# Altium PCB FPv1.3.1.PcbDoc (part 1 of 4)
Units mm, origin at the board's own origin, x right, y up, seen from the top; angles counter-clockwise.
Board outline 81.28 x 53.34 mm, 4 copper layers (Top Layer, GROUND PLANE, POWER PLANE, Bottom Layer); 98 components, 183 nets, 614 pads, 312 vias.
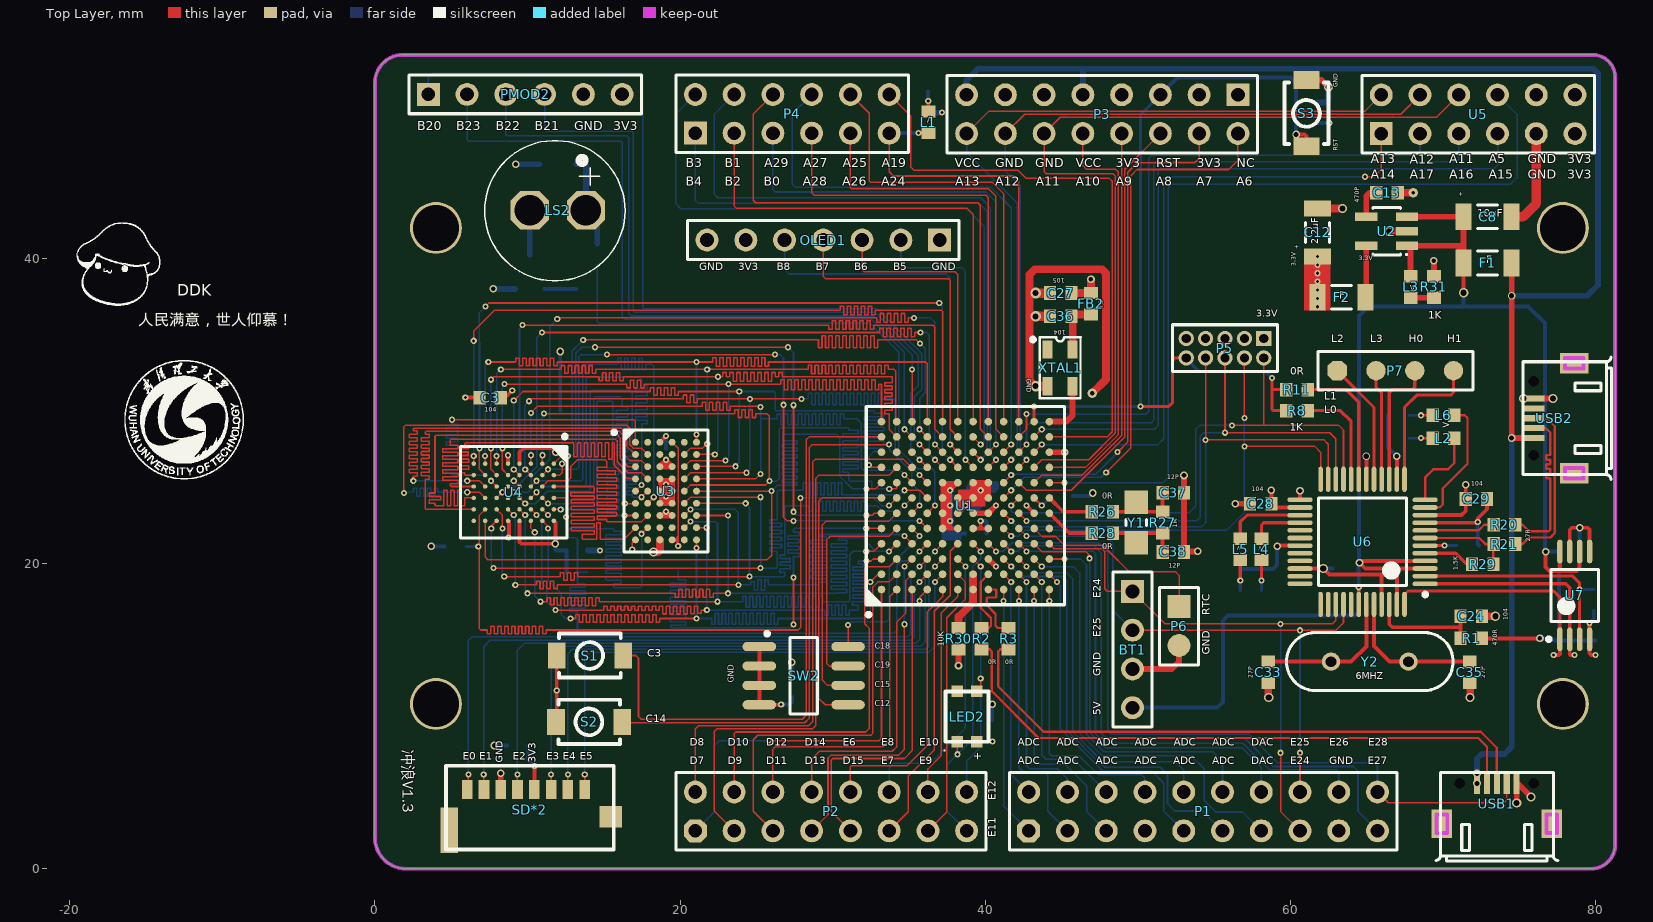
[diagram p0: Top Layer view]
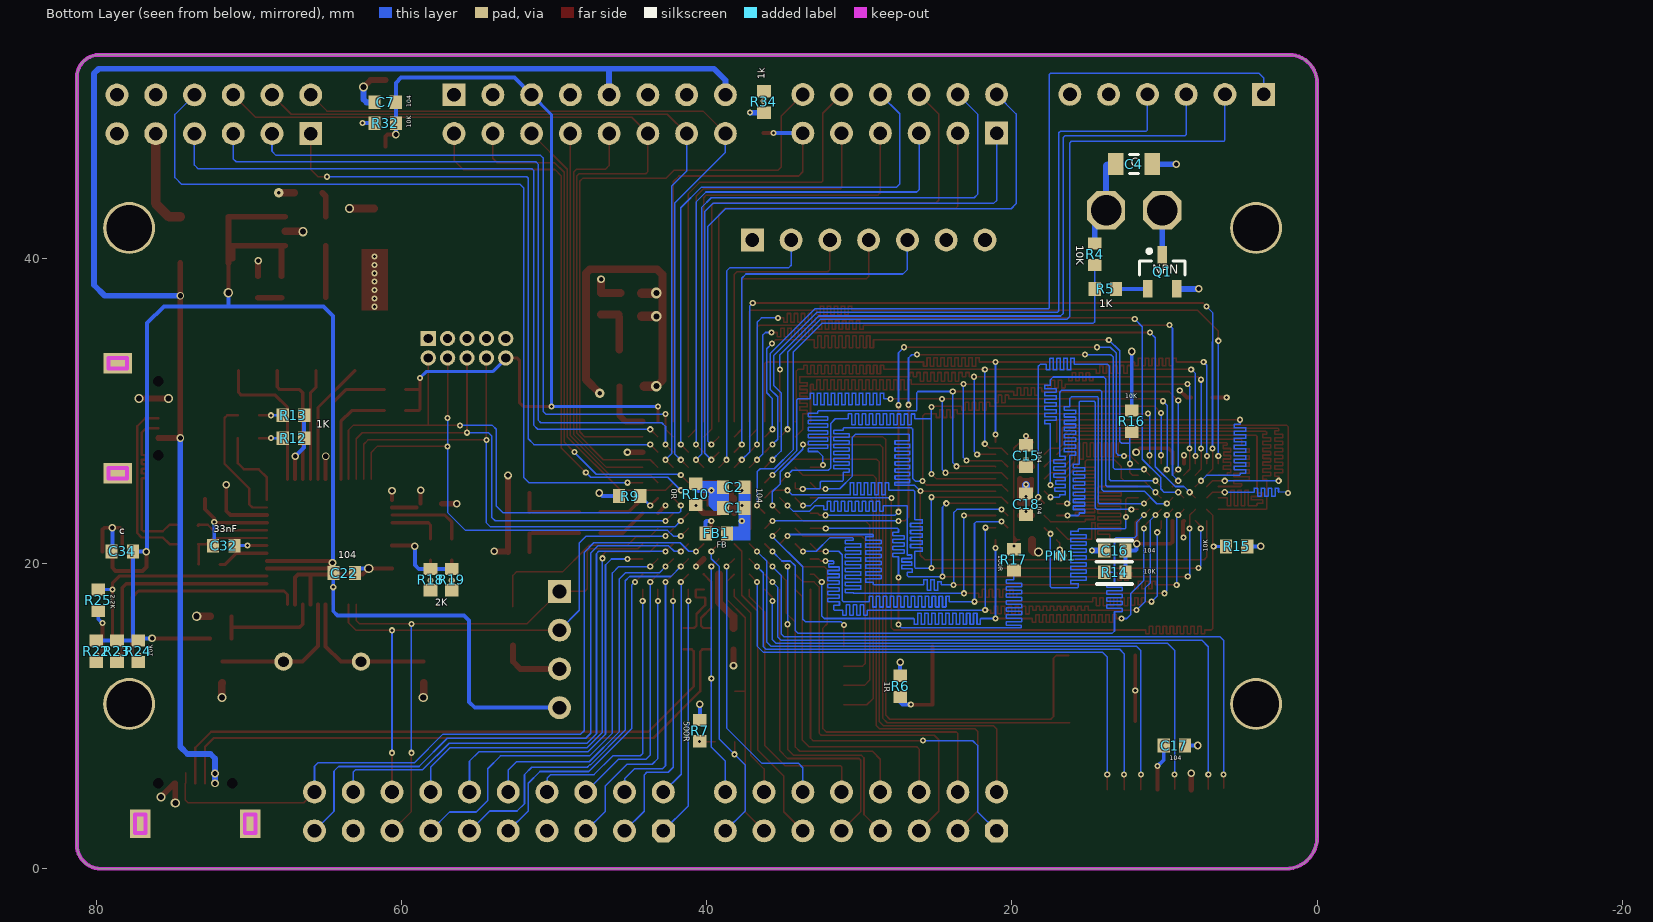
[diagram p1: Bottom Layer view, seen from below]
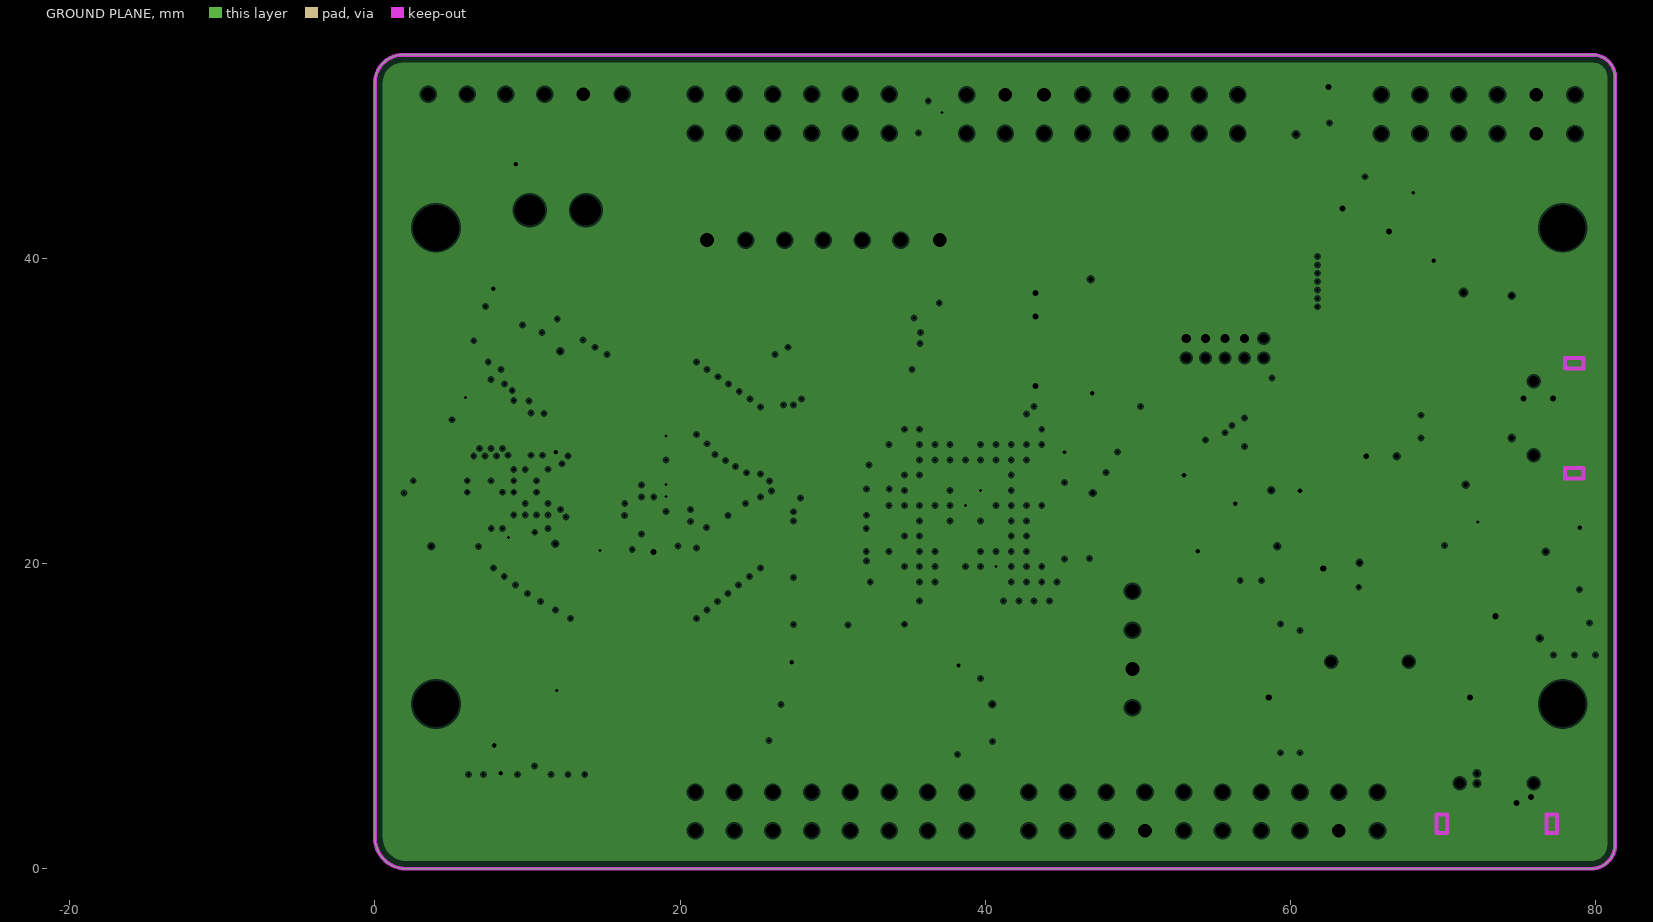
[diagram p2: GROUND PLANE, clearances drawn from the general rule]
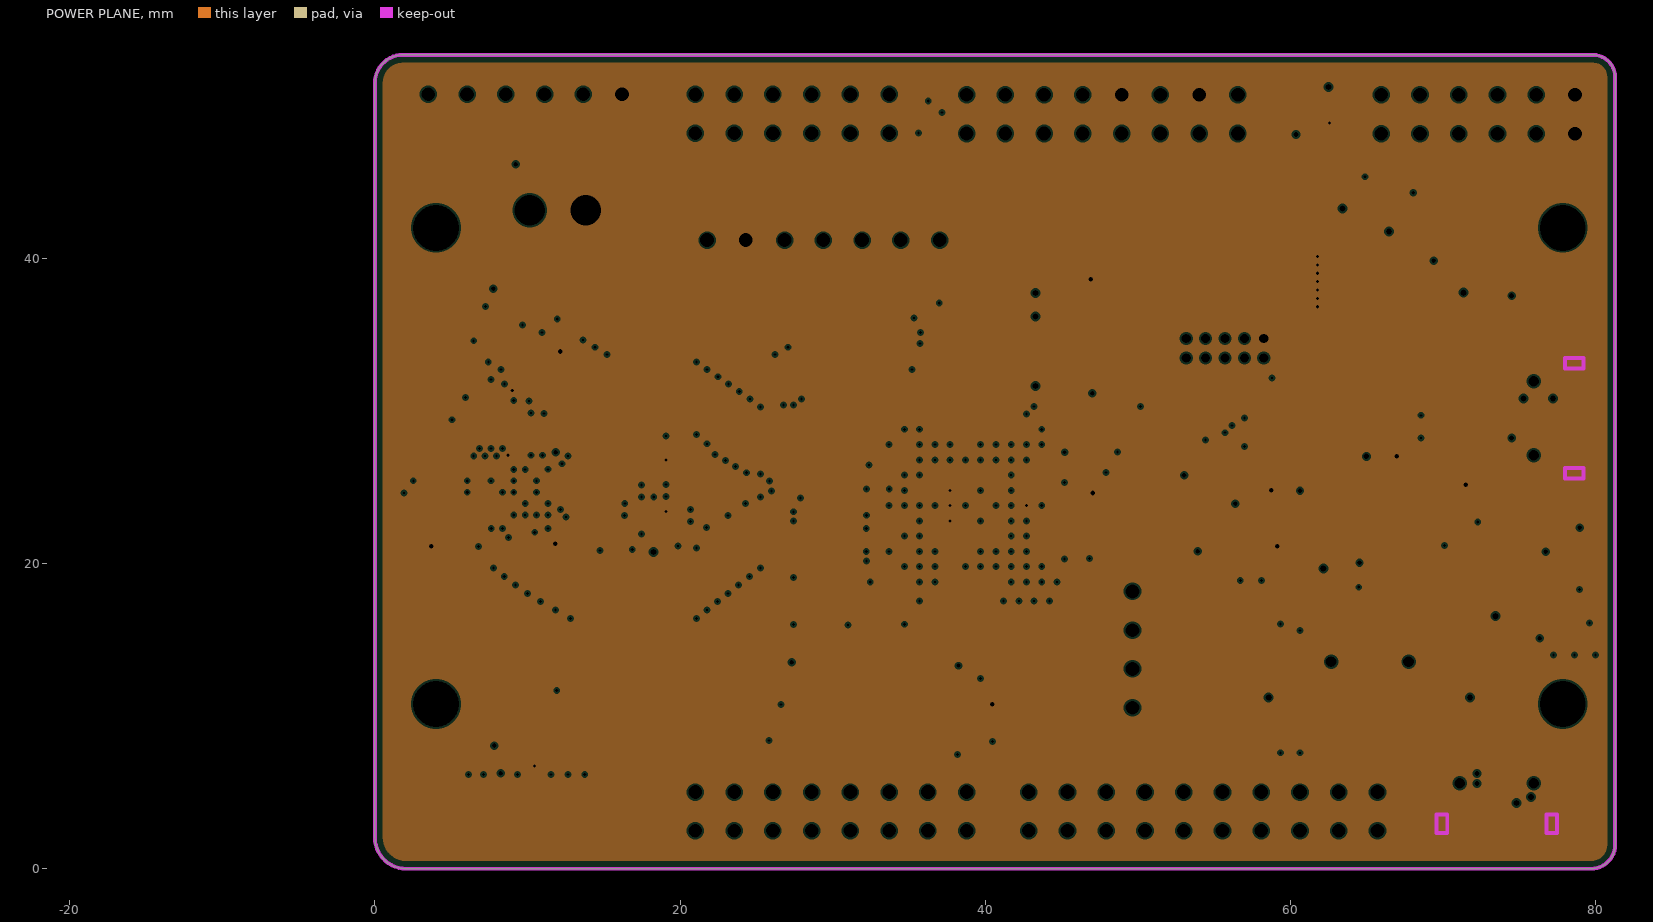
[diagram p3: POWER PLANE, clearances drawn from the general rule]

## Layer stack, top to bottom
Top Layer: signal copper 0.0356
Dielectric: prepreg 0.32, FR-4, Dk 4.8
GROUND PLANE: plane copper 0.0356, net GND
Dielectric: core 0.32, FR-4, Dk 4.8
POWER PLANE: plane copper 0.0356, net 3.3V
Dielectric: prepreg 0.32, FR-4, Dk 4.8
Bottom Layer: signal copper 0.0356

## Board outline
0,2.05 0,51.5 cw(c1.84,51.5) 1.84,53.34 79.81,53.34 cw(c79.81,51.87) 81.28,51.87 81.28,1.58 cw(c79.7,1.58) 79.7,0 2.05,0 cw(c2.05,2.05)

## Design rules (kind name [scope] priority, off if disabled: settings)
Clearance [All] p1: gap=0.102
DiffPairsRouting [All] p1: maxlimit=2.54 minlimit=0.102 mostfreqgap=0.254 bottomlayer_maxgap=1.27 maxuncoupledlength=12.7
HoleSize [All] p1: absolutevalues=TRUE maxlimit=12.7 minlimit=0.2 maxpercent=80.000 minpercent=20.000
PlaneClearance [All] p1: clearance=0.127
PlaneConnect PlaneConnect_1 [All] p1: planeconnectstyle=Direct reliefexpansion=0.102 reliefentries=4 reliefconductorwidth=0.152 reliefairgap=0.254
PolygonConnect [All] p1: connectstyle=Direct reliefconductorwidth=0.254 reliefentries=4 polygonreliefangle="90 Angle" airgapwidth=0.127
RoutingVias [All] p1: holewidth=0.711 width=1.27 viastyle="Through Hole" minholewidth=0.711 minwidth=1.27 maxholewidth=0.711 maxwidth=1.27
SolderMaskExpansion [All] p1: expansion=0.102
Width [All] p1: maxlimit=1.778 minlimit=0.102 preferedwidth=0.254 minimp=50.000000 maximp=50.000000 favimp=50.000000
24 further rules are at their usual default settings.

## Classes and differential pairs
net class PTC[19..12]: PTC3 PTC12 PTC13 PTC14 PTC15 PTC18 PTC19
net class PTD[15..7]: PTD7 PTD8 PTD9 PTD10 PTD11 PTD12 PTD13 PTD14 PTD15
net class PTB[23..0]: PTB0 PTB1 PTB2 PTB3 PTB4 PTB5 PTB6 PTB7 PTB8 PTB20 PTB21 PTB22 PTB23
net class PTA[29..11]: PTA4 PTA5 PTA11 PTA12 PTA13 PTA14 PTA15 PTA16 PTA17 PTA24 PTA25 PTA26 PTA27 PTA28 PTA29
net class FTM3_CH[7..1]: FTM3_CH1 FTM3_CH2 FTM3_CH3 FTM3_CH4 FTM3_CH5 FTM3_CH6 FTM3_CH7
net class ANALOG[13..1]: ANALOG1 ANALOG2 ANALOG3 ANALOG4 ANALOG5 ANALOG6 ANALOG7 ANALOG8 ANALOG9 ANALOG10 ANALOG11 ANALOG12 ANALOG13
from-to class SRAM_DATA: AD0(U1-B2:U4-B6) AD1(U1-A2:U4-C5) AD2(U1-A3:U4-C6) AD3(U1-B3:U4-D5) AD4(U1-C3:U4-E5) AD5(U1-C6:U4-F5) AD6(U1-D6:U4-F6) AD7(U1-A7:U4-G6) AD8(U1-B7:U4-B1) AD9(U1-C7:U4-C1) AD10(U1-D7:U4-C2) AD11(U1-A8:U4-D2) AD12(U1-C8:U4-E2) AD13(U1-D8:U4-F2) AD14(U1-B9:U4-F1) AD15(U1-D9:U4-G1) "AD16 (U1-E9 : U4-F4)" AD17(U1-B10:U4-E4) AD18(U1-C10:U4-D3) AD19(U1-D10:U4-H1) AD20(U1-E10:U4-G2)
component class MCU_K64FX: C1 C2 C3 C7 C27 C36 C37 C38 FB1 FB2 P5 P6 R9 R10 R26 R27 R28 R30 R32 S1 S2 S3 U1 XTAL1 Y1
component class Memory: C15 C16 C17 C18 PIN1 R14 R15 R16 R17 U3 U4
component class power_manage: C8 C12 C13 F1 F2 L3 R31 U2
component class protocol1: BT1 C4 L1 LED2 LS2 OLED1 P1 P2 P3 P4 PMOD2 Q1 R2 R3 R4 R5 R6 R7 R34 SD*2 SW2 U5 USB1
component class protocol2: C22 C24 C28 C29 C32 C33 C34 C35 L2 L4 L5 L6 P7 R1 R8 R11 R12 R13 R18 R19 R20 R21 R22 R23 R24 R25 R29 U6 U7 USB2 Y2
net class AD[20..0]: AD0 AD1 AD2 AD3 AD4 AD5 AD6 AD7 AD8 AD9 AD10 AD11 AD12 AD13 AD14 AD15 AD16 AD17 AD18 AD19 AD20
net class PTE[0..28]: PTE0 PTE1 PTE2 PTE3 PTE4 PTE5 PTE24 PTE25 PTE26 PTE27 PTE28
differential pair USB0D: +USB0D_P -USB0D_N
differential pair USB1D: +USB1D_P -USB1D_N
differential pair USBPD: +USBPD_P -USBPD_N
differential pair USB0R: +USB0R_P -USB0R_N

## Components (designator, comment, footprint, x,y, rotation, side; value= is the part's Value field where it differs from the comment)
BT1 "Header 4" HDR1X4#1 49.65,18.175 r270 top
C1 "Cap" 1608[0603] 38.227,23.647 r180 bottom
C2 "Cap" 1608[0603] 38.227,24.994 r180 bottom
C3 "Cap" 1608[0603] 7.55,30.875 r0 top
C4 "Cap" C2012 12,46.175 r0 bottom
C7 "Cap" 1608[0603] 61.075,50.225 r180 bottom
C8 "Cap Pol1" 1206(2) 72.925,42.725 r0 top
C12 "Cap Pol1" 1206(2) 61.775,41.7 r90 top
C13 "Cap" 1608[0603] 66.325,44.3 r180 top
C15 "Cap" 1608[0603] 19.075,27.05 r270 bottom
C16 "Cap" 1608[0603] 13.25,20.85 r180 bottom
C17 "Cap" 1608[0603] 9.35,8.075 r0 bottom
C18 "Cap" 1608[0603] 19.075,23.9 r270 bottom
C22 "Cap" 1608[0603] 63.75,19.375 r0 bottom
C24 "Cap" 1608[0603] 71.85,16.55 r0 top
C27 "Cap" 1608[0603] 44.95,37.725 r0 top
C28 "Cap" 1608[0603] 58.05,23.925 r0 top
C29 "Cap" 1608[0603] 72.187,24.236 r180 top
C32 "Cap" 1608[0603] 71.65,21.175 r0 bottom
C33 "Cap" 1608[0603] 58.55,12.875 r90 top
C34 "Cap" 1608[0603] 78.304,20.791 r180 bottom
C35 "Cap" 1608[0603] 71.75,12.875 r270 top
C36 "Cap" 1608[0603] 44.95,36.2 r0 top
C37 "Cap" 1608[0603] 52.325,24.64 r180 top
C38 "Cap" 1608[0603] 52.325,20.765 r180 top
F1 "300-500mA" 1206(2) 72.925,39.7 r180 top
F2 "300-500mA" 1206(2) 63.35,37.45 r180 top
FB1 "Inductor" 1608[0603] 39.37,21.971 r0 bottom
FB2 "Inductor" 1608[0603] 46.925,37.025 r270 top
L1 "LED" 1608[0603] 36.275,48.925 r90 top
L2 "LED" 1608[0603] 70.028,28.219 r0 top
L3 "LED" 1608[0603] 67.875,38.125 r270 top
L4 "LED" 1608[0603] 58.1,20.925 r90 top
L5 "LED" 1608[0603] 56.709,20.929 r90 top
L6 "LED" 1608[0603] 70.028,29.718 r0 top
LED2 "RGB_LED1206" RGB 38.8,9.975 r90 top
LS2 "Bell" BZ 11.8,43.15 r270 top
OLED1 "Header 7" HDR1X7 37.008,41.199 r180 top
P1 "Header 10X2" HDR2X10 42.845,2.485 r0 top
P2 "Header 8X2" HDR2X8#1 21.001,2.485 r0 top
P3 "Header 8X2" HDR2X8#2 56.556,50.725 r180 top
P4 "Header 6X2" HDR2X6 21.001,48.205 r0 top
P5 "JTAG" MHDR2X5 58.25,34.75 r180 top
P6 "Header 2" HDR1X2 52.7,17.175 r270 top
P7 "Header 4" HDR1X4#2 63.068,32.639 r0 top
PIN1 "PIN" PIN 16.815,20.523 r180 bottom
PMOD2 "Header 6" HDR1X6 3.5,50.75 r0 top
Q1 "QNPN" SOT23_N 10.15,39.125 r90 bottom
R1 "Res" 1608[0603] 71.85,15.1 r180 top
R2 "Res" 1608[0603] 39.75,15.075 r270 top
R3 "Res" 1608[0603] 41.525,15.075 r270 top
R4 "10k" 1608[0603] 14.575,40.275 r270 bottom
R5 "Res2" 1608[0603] 13.875,38 r0 bottom
R6 "Res2" 1608[0603] 27.325,11.95 r270 bottom
R7 "Res" 1608[0603] 40.45,9.05 r90 bottom
R8 "Res" 1608[0603] 60.427,30.023 r0 top
R9 "Res" 1608[0603] 45.05,24.425 r180 bottom
R10 "Res" 1608[0603] 40.716,24.536 r270 bottom
R11 "Res" 1608[0603] 60.427,31.394 r0 top
R12 "Res" 1608[0603] 67.081,28.219 r180 bottom
R13 "Res" 1608[0603] 67.081,29.718 r180 bottom
R14 "Res" 1608[0603] 13.25,19.425 r180 bottom
R15 "Res" 1608[0603] 5.275,21.125 r180 bottom
R16 "Res" 1608[0603] 12.15,29.325 r90 bottom
R17 "Res" 1608[0603] 19.863,20.244 r90 bottom
R18 "Res" 1608[0603] 58.1,18.947 r90 bottom
R19 "Res" 1608[0603] 56.709,18.951 r90 bottom
R20 "Res" 1608[0603] 74.025,22.55 r180 top
R21 "Res" 1608[0603] 74.025,21.275 r180 top
R22 "Res" 1608[0603] 80,14.25 r270 bottom
R23 "Res" 1608[0603] 78.65,14.25 r270 bottom
R24 "Res" 1608[0603] 77.25,14.25 r270 bottom
R25 "Res" 1608[0603] 79.875,17.6 r270 bottom
R26 "Res" 1608[0603] 47.679,23.392 r180 top
R27 "Res" 1608[0603] 51.625,22.69 r270 top
R28 "Res" 1608[0603] 47.679,21.995 r180 top
R29 "Res" 1608[0603] 72.6,19.95 r180 top
R30 "Res" 1608[0603] 38.25,15.075 r90 top
R31 "Res" 1608[0603] 69.4,38.125 r270 top
R32 "Res" 1608[0603] 61.069,48.864 r180 bottom
R34 "Res" 1608[0603] 36.25,50.25 r90 bottom
S1 "SW-PB" "key 3*4*2" 14.075,13.975 r180 top
S2 "SW-PB" "key 3*4*2" 14.025,9.625 r180 top
S3 "SW-PB" "key 3*4*2" 61.05,49.5 r270 top
SD*2 "TF_card" TF卡座(短体) 4.65,1.25 r0 top
SW2 "SW DIP-4" SOIC-8 28.1,12.65 r0 top
U1 "MK64BGA144" BGA144C100P12X12_1300X1300X161 38.7,23.8 r90 top
U2 "MIC5219" SOT-23-5 66.3,41.775 r90 top
U3 "SN74LVC16373A(BGA54)" BGA54C80P6X9_550X800X120 19.075,24.75 r0 top
U4 "EM7164SU16" BGA48C75P6X8_598X698X104 9.1,24.675 r270 top
U5 "Header 6X2" HDR2X6 65.95,48.175 r0 top
U6 "FT2232D" TSQFP50P900X900X160-48N 64.725,21.425 r180 top
U7 "AT93C46D" TSOP65P640X120-8N-AT93C46D 78.629,17.916 r90 top
USB1 "USB_5line" USB-MICRO-5P-2F#1 72.225,5.6 r180 top
USB2 "USB_5line" USB-MICRO-5P-2F#2 75.95,28.225 r270 top
XTAL1 "50M有源晶体" XTAL7_3225 44.9,32.825 r270 top
Y1 "32.768kHZ" 3215 49.9,22.69 r270 top
Y2 "6MHz" XTAL-RAD-0.2 65.2,13.575 r180 top

## Footprints (in the part's own frame and the unit in brackets; to place one, negate y for a bottom-side part, rotate by r counter-clockwise, add the part's x,y. Pads: shape width x height; smd on the part's side, far side on the other; paste and mask are expansions set on the pad)
1206(2) [mm]
  rect 1.05x1.75 smd: 1(-1.575,0) 2(1.575,0)
  silkscreen extent -0.65,-0.77 0.65,0.77, body extent -1.6,-0.8 1.6,0.8, height 1.6
1608[0603] [mm] "Chip Capacitor, Body 1.6x0.8mm, IPC High Density"
  rect 0.8x0.9 smd: 1(-0.7,0) 2(0.7,0)
  body extent -0.87,-0.48 0.87,0.48, height 1.3
3215 [mm]
  rect 1.54x1.55 smd: 1(-1.335,0) 2(1.335,0)
  silkscreen extent -0.2,-0.67 0.2,0.67, body extent -1.65,-0.75 1.65,0.75, height 0.75
BGA48C75P6X8_598X698X104 [mm] "BGA, 48-Leads, Body 5.98x6.98mmx1.04mm, Pitch 0.75mm"
  round 0.29 smd: A1(-1.875,2.625) A2(-1.125,2.625) A3(-0.375,2.625) A4(0.375,2.625) A5(1.125,2.625) A6(1.875,2.625) B1(-1.875,1.875) B2(-1.125,1.875) B3(-0.375,1.875) B4(0.375,1.875) B5(1.125,1.875) B6(1.875,1.875) C1(-1.875,1.125) C2(-1.125,1.125) C3(-0.375,1.125) C4(0.375,1.125) C5(1.125,1.125) C6(1.875,1.125) D1(-1.875,0.375) D2(-1.125,0.375) D3(-0.375,0.375) D4(0.375,0.375) D5(1.125,0.375) D6(1.875,0.375) E1(-1.875,-0.375) E2(-1.125,-0.375) E3(-0.375,-0.375) E4(0.375,-0.375) E5(1.125,-0.375) E6(1.875,-0.375) F1(-1.875,-1.125) F2(-1.125,-1.125) F3(-0.375,-1.125) F4(0.375,-1.125) F5(1.125,-1.125) F6(1.875,-1.125) G1(-1.875,-1.875) G2(-1.125,-1.875) G3(-0.375,-1.875) G4(0.375,-1.875) G5(1.125,-1.875) G6(1.875,-1.875) H1(-1.875,-2.625) H2(-1.125,-2.625) H3(-0.375,-2.625) H4(0.375,-2.625) H5(1.125,-2.625) H6(1.875,-2.625)
  silkscreen extent -3.77,-3.5 3,3.5, body extent -2.99,-3.49 2.99,3.49, height 1.04
BGA54C80P6X9_550X800X120 [mm] "BGA, 54-Leads, Body 5.50x8.00mmx1.20mm, Pitch 0.80mm"
  round 0.45 smd: A1(-2,3.2) A2(-1.2,3.2) A3(-0.4,3.2) A4(0.4,3.2) A5(1.2,3.2) A6(2,3.2) B1(-2,2.4) B2(-1.2,2.4) B3(-0.4,2.4) B4(0.4,2.4) B5(1.2,2.4) B6(2,2.4) C1(-2,1.6) C2(-1.2,1.6) C3(-0.4,1.6) C4(0.4,1.6) C5(1.2,1.6) C6(2,1.6) D1(-2,0.8) D2(-1.2,0.8) D3(-0.4,0.8) D4(0.4,0.8) D5(1.2,0.8) D6(2,0.8) E1(-2,0) E2(-1.2,0) E3(-0.4,0) E4(0.4,0) E5(1.2,0) E6(2,0) F1(-2,-0.8) F2(-1.2,-0.8) F3(-0.4,-0.8) F4(0.4,-0.8) F5(1.2,-0.8) F6(2,-0.8) G1(-2,-1.6) G2(-1.2,-1.6) G3(-0.4,-1.6) G4(0.4,-1.6) G5(1.2,-1.6) G6(2,-1.6) H1(-2,-2.4) H2(-1.2,-2.4) H3(-0.4,-2.4) H4(0.4,-2.4) H5(1.2,-2.4) H6(2,-2.4) J1(-2,-3.2) J2(-1.2,-3.2) J3(-0.4,-3.2) J4(0.4,-3.2) J5(1.2,-3.2) J6(2,-3.2)
  silkscreen extent -3.52,-4 2.75,4, body extent -2.75,-4 2.75,4, height 1.2
BGA144C100P12X12_1300X1300X161 [mm] "BGA, 144-Leads, Body 13.00x13.00mmx1.61mm, Pitch 1.00mm"
  round 0.5 smd: A1(-5.5,5.5) A2(-4.5,5.5) A3(-3.5,5.5) A4(-2.5,5.5) A5(-1.5,5.5) A6(-0.5,5.5) A7(0.5,5.5) A8(1.5,5.5) A9(2.5,5.5) A10(3.5,5.5) A11(4.5,5.5) A12(5.5,5.5) B1(-5.5,4.5) B2(-4.5,4.5) B3(-3.5,4.5) B4(-2.5,4.5) B5(-1.5,4.5) B6(-0.5,4.5) B7(0.5,4.5) B8(1.5,4.5) B9(2.5,4.5) B10(3.5,4.5) B11(4.5,4.5) B12(5.5,4.5) C1(-5.5,3.5) C2(-4.5,3.5) C3(-3.5,3.5) C4(-2.5,3.5) C5(-1.5,3.5) C6(-0.5,3.5) C7(0.5,3.5) C8(1.5,3.5) C9(2.5,3.5) C10(3.5,3.5) C11(4.5,3.5) C12(5.5,3.5) D1(-5.5,2.5) D2(-4.5,2.5) D3(-3.5,2.5) D4(-2.5,2.5) D5(-1.5,2.5) D6(-0.5,2.5) D7(0.5,2.5) D8(1.5,2.5) D9(2.5,2.5) D10(3.5,2.5) D11(4.5,2.5) D12(5.5,2.5) E1(-5.5,1.5) E2(-4.5,1.5) E3(-3.5,1.5) E4(-2.5,1.5) E5(-1.5,1.5) E6(-0.5,1.5) E7(0.5,1.5) E8(1.5,1.5) E9(2.5,1.5) E10(3.5,1.5) E11(4.5,1.5) E12(5.5,1.5) F1(-5.5,0.5) F2(-4.5,0.5) F3(-3.5,0.5) F4(-2.5,0.5) F5(-1.5,0.5) F6(-0.5,0.5) F7(0.5,0.5) F8(1.5,0.5) F9(2.5,0.5) F10(3.5,0.5) F11(4.5,0.5) F12(5.5,0.5) G1(-5.5,-0.5) G2(-4.5,-0.5) G3(-3.5,-0.5) G4(-2.5,-0.5) G5(-1.5,-0.5) G6(-0.5,-0.5) G7(0.5,-0.5) G8(1.5,-0.5) G9(2.5,-0.5) G10(3.5,-0.5) G11(4.5,-0.5) G12(5.5,-0.5) H1(-5.5,-1.5) H2(-4.5,-1.5) H3(-3.5,-1.5) H4(-2.5,-1.5) H5(-1.5,-1.5) H6(-0.5,-1.5) H7(0.5,-1.5) H8(1.5,-1.5) H9(2.5,-1.5) H10(3.5,-1.5) H11(4.5,-1.5) H12(5.5,-1.5) J1(-5.5,-2.5) J2(-4.5,-2.5) J3(-3.5,-2.5) J4(-2.5,-2.5) J5(-1.5,-2.5) J6(-0.5,-2.5) J7(0.5,-2.5) J8(1.5,-2.5) J9(2.5,-2.5) J10(3.5,-2.5) J11(4.5,-2.5) J12(5.5,-2.5) K1(-5.5,-3.5) K2(-4.5,-3.5) K3(-3.5,-3.5) K4(-2.5,-3.5) K5(-1.5,-3.5) K6(-0.5,-3.5) K7(0.5,-3.5) K8(1.5,-3.5) K9(2.5,-3.5) K10(3.5,-3.5) K11(4.5,-3.5) K12(5.5,-3.5) L1(-5.5,-4.5) L2(-4.5,-4.5) L3(-3.5,-4.5) L4(-2.5,-4.5) L5(-1.5,-4.5) L6(-0.5,-4.5) L7(0.5,-4.5) L8(1.5,-4.5) L9(2.5,-4.5) L10(3.5,-4.5) L11(4.5,-4.5) L12(5.5,-4.5) M1(-5.5,-5.5) M2(-4.5,-5.5) M3(-3.5,-5.5) M4(-2.5,-5.5) M5(-1.5,-5.5) M6(-0.5,-5.5) M7(0.5,-5.5) M8(1.5,-5.5) M9(2.5,-5.5) M10(3.5,-5.5) M11(4.5,-5.5) M12(5.5,-5.5)
  silkscreen extent -7.27,-6.5 6.5,6.5, body extent -6.5,-6.5 6.5,6.5, height 1.61
BZ [mm]
  oct 2.5x2.5 hole 2: 1(0,2.032) 2(0,-1.651)
  silkscreen extent -4.57,-4.61 4.62,4.59
C2012 [mm] "Chip Capacitor, 2-Leads, Body 2.0x1.2mm, IPC Low Density"
  rect 1x1.45 smd: 1(-1.2,0) 2(1.2,0)
  silkscreen extent -0.3,-0.63 0.3,0.63, body extent -0.98,-0.6 1.02,0.6, height 0.5
HDR1X2 [mm] "Connector; Header; 2 Position"
  rect 1.5x1.5 smd: 1(0,0)
  round 1.5 smd: 2(2.54,0)
  silkscreen extent -1.27,-1.27 3.81,1.27
HDR1X4#1 [mm] "Connector; Header; 4 Position"
  rect 1.5x1.5 hole 0.9: 1(0,0)
  round 1.5 hole 0.9: 2(2.54,0) 3(5.08,0) 4(7.62,0)
  silkscreen extent -1.27,-1.27 8.89,1.27
HDR1X4#2 [mm] "Connector; Header; 4 Position"
  oct 1.27x1.27 smd: 1(0,0)
  round 1.27 smd: 2(2.54,0) 3(5.08,0) 4(7.62,0)
  silkscreen extent -1.27,-1.27 8.89,1.27
HDR1X6 [mm] "Connector; Header; 6 Position"
  rect 1.5x1.5 hole 0.9: 1(0,0)
  round 1.5 hole 0.9: 2(2.54,0) 3(5.08,0) 4(7.62,0) 5(10.16,0) 6(12.7,0)
  silkscreen extent -1.27,-1.27 13.97,1.27, body extent -1.27,-1.27 13.97,1.27, height 7.58
HDR1X7 [mm] "Connector; Header; 7 Position"
  rect 1.5x1.5 hole 0.9: 1(0,0)
  round 1.5 hole 0.9: 2(2.54,0) 3(5.08,0) 4(7.62,0) 5(10.16,0) 6(12.7,0) 7(15.24,0)
  silkscreen extent -1.27,-1.27 16.51,1.27
HDR2X6 [mm] "Connector; Header; 6x2 Position"
  rect 1.5x1.5 hole 0.9: 1(0,0)
  round 1.5 hole 0.9: 2(0,2.54) 3(2.54,0) 4(2.54,2.54) 5(5.08,0) 6(5.08,2.54) 7(7.62,0) 8(7.62,2.54) 9(10.16,0) 10(10.16,2.54) 11(12.7,0) 12(12.7,2.54)
  silkscreen extent -1.27,-1.27 13.97,3.81, body extent -1.27,-1.27 13.97,3.81, height 7.58
HDR2X8#1 [mm] "Connector; Header; 8x2 Position"
  oct 1.5x1.5 hole 0.9: 1(0,0)
  round 1.5 hole 0.9: 2(0,2.54) 3(2.54,0) 4(2.54,2.54) 5(5.08,0) 6(5.08,2.54) 7(7.62,0) 8(7.62,2.54) 9(10.16,0) 10(10.16,2.54) 11(12.7,0) 12(12.7,2.54) 13(15.24,0) 14(15.24,2.54) 15(17.78,0) 16(17.78,2.54)
  silkscreen extent -1.27,-1.27 19.05,3.81, body extent -1.27,-1.27 19.05,3.81, height 7.58
HDR2X8#2 [mm] "Connector; Header; 8x2 Position"
  rect 1.5x1.5 hole 0.9: 1(0,0)
  round 1.5 hole 0.9: 2(0,2.54) 3(2.54,0) 4(2.54,2.54) 5(5.08,0) 6(5.08,2.54) 7(7.62,0) 8(7.62,2.54) 9(10.16,0) 10(10.16,2.54) 11(12.7,0) 12(12.7,2.54) 13(15.24,0) 14(15.24,2.54) 15(17.78,0) 16(17.78,2.54)
  silkscreen extent -1.27,-1.27 19.05,3.81, body extent -1.27,-1.27 19.05,3.81, height 7.58
HDR2X10 [mm] "Connector; Header; 10x2 Position"
  oct 1.5x1.5 hole 0.9: 1(0,0)
  round 1.5 hole 0.9: 2(0,2.54) 3(2.54,0) 4(2.54,2.54) 5(5.08,0) 6(5.08,2.54) 7(7.62,0) 8(7.62,2.54) 9(10.16,0) 10(10.16,2.54) 11(12.7,0) 12(12.7,2.54) 13(15.24,0) 14(15.24,2.54) 15(17.78,0) 16(17.78,2.54) 17(20.32,0) 18(20.32,2.54) 19(22.86,0) 20(22.86,2.54)
  silkscreen extent -1.27,-1.27 24.13,3.81, body extent -1.27,-1.27 24.13,3.81, height 7.58
"key 3*4*2" [mm]
  rect 1.15x1.7 smd: 1(-2.191,0) 2(2.159,0)
  silkscreen extent -2.03,-1.45 2,1.45
MHDR2X5 [mm] "Connector; Header; 5x2 Position"
  rect 1x1 hole 0.6: 1(0,0)
  round 1 hole 0.6: 2(0,1.27) 3(1.27,0) 4(1.27,1.27) 5(2.54,0) 6(2.54,1.27) 7(3.81,0) 8(3.81,1.27) 9(5.08,0) 10(5.08,1.27)
  silkscreen extent -0.9,-0.9 5.98,2.17
PIN [mil]
  round 30 smd: 1(0,0)
RGB [mil]
  rect 30x30 smd: 1(-65,25) 2(-65,-25) 3(65,-25) 4(65,25)
  silkscreen extent -90,-55 65,60
SOIC-8 [mm] "IOS1540\1"
  oval 2.2x0.6 smd: 1(-2.908,1.905) 2(-2.908,0.635) 3(-2.908,-0.635) 4(-2.908,-1.905) 5(2.908,-1.905) 6(2.908,-0.635) 7(2.908,0.635) 8(2.908,1.905)
  silkscreen extent -2.52,-2.5 0.9,2.88, body extent -2,-2.5 2,2.5, height 1.75
SOT23_N [mm] "SOT23, 3-Leads, Body 2.9x1.3mm, Pitch 0.95mm, Lead Span 2.3mm - Reverse Pinning, IPC Medium Density"
  rect 1.15x0.6 smd: 1(1.125,0) 2(-1.125,-0.95) 3(-1.125,0.95)
  silkscreen extent -0.2,-1.5 1.47,1.5, body extent -0.7,-1.5 0.7,1.5, height 1.1
SOT-23-5 [mm] "SOT-23/SC-74A; 5 Leads; Body 3.1 x 3 mm, inc. leads (LxW max)"
  rect 0.55x1.45 smd: 1(-0.95,-1.329) 2(0,-1.329) 3(0.95,-1.329) 4(0.95,1.329) 5(-0.95,1.329)
  silkscreen extent -1.57,-1.35 1.55,0.9
TF卡座(短体) [mm]
  rect 1.15x3 smd: 0(0.227,1.27)
  rect 1.48x1.4 smd: 0(10.795,2.159)
  rect 0.7x1.25 smd: 1(9.097,3.937) 2(7.997,3.937) 3(6.897,3.937) 4(5.797,3.937) 5(4.697,3.937) 6(3.597,3.937) 7(2.497,3.937) 8(1.397,3.937)
  silkscreen extent 0,0 11,5.5
TSOP65P640X120-8N-AT93C46D [mm] "TSOP, 8-Leads, Body 3.00x4.40mm, Pitch 0.65mm, IPC Medium Density"
  oval 1.55x0.35 smd: 1(-2.875,0.975) 2(-2.875,0.325) 3(-2.875,-0.325) 4(-2.875,-0.975) 5(2.875,-0.975) 6(2.875,-0.325) 7(2.875,0.325) 8(2.875,0.975)
  silkscreen extent -3,-1.55 1.7,1.82, body extent -2.25,-1.55 2.25,1.55, height 1.2
TSQFP50P900X900X160-48N [mm] "TSQFP, 48-Leads,FTDI FT2232D"
  oval 1.65x0.3 smd: 1(-4.1,2.75) 2(-4.1,2.25) 3(-4.1,1.75) 4(-4.1,1.25) 5(-4.1,0.75) 6(-4.1,0.25) 7(-4.1,-0.25) 8(-4.1,-0.75) 9(-4.1,-1.25) 10(-4.1,-1.75) 11(-4.1,-2.25) 12(-4.1,-2.75) 25(4.1,-2.75) 26(4.1,-2.25) 27(4.1,-1.75) 28(4.1,-1.25) 29(4.1,-0.75) 30(4.1,-0.25) 31(4.1,0.25) 32(4.1,0.75) 33(4.1,1.25) 34(4.1,1.75) 35(4.1,2.25) 36(4.1,2.75)
  oval 0.3x1.65 smd: 13(-2.75,-4.1) 14(-2.25,-4.1) 15(-1.75,-4.1) 16(-1.25,-4.1) 17(-0.75,-4.1) 18(-0.25,-4.1) 19(0.25,-4.1) 20(0.75,-4.1) 21(1.25,-4.1) 22(1.75,-4.1) 23(2.25,-4.1) 24(2.75,-4.1) 37(2.75,4.1) 38(2.25,4.1) 39(1.75,4.1) 40(1.25,4.1) 41(0.75,4.1) 42(0.25,4.1) 43(-0.25,4.1) 44(-0.75,4.1) 45(-1.25,4.1) 46(-1.75,4.1) 47(-2.25,4.1) 48(-2.75,4.1)
  silkscreen extent -4.23,-2.88 2.88,3.57, body extent -3.5,-3.5 3.5,3.5, height 1.6
USB-MICRO-5P-2F#1 [mm]
  round 0 hole 0.7: 0(-3.725,0) 0(1.125,0)
  rect 0.4x1.4 smd: 1(0,0) 2(-0.65,0) 3(-1.3,0) 4(-1.95,0) 5(-2.6,0)
  rect 1.35x1.85 all layers, no hole: 6(2.3,2.65) 7(-4.9,2.65)
  Keep-Out Layer lines w0.254: 2.65,3.25 2.65,2.05 1.95,2.05 1.95,3.25 2.65,3.25 ; -4.55,3.25 -5.25,3.25 -5.25,2.05 -4.55,2.05 -4.55,3.25
  silkscreen extent -5.3,-0.7 2.7,5.1
USB-MICRO-5P-2F#2 [mm]
  round 0 hole 0.7 mask+0.051: 0(-3.725,0) 0(1.125,0)
  rect 0.4x1.4 smd: 1(0,0) 2(-0.65,0) 3(-1.3,0) 4(-1.95,0) 5(-2.6,0)
  rect 1.35x1.85 all layers, no hole: 6(2.3,2.65) 7(-4.9,2.65)
  Keep-Out Layer lines w0.254: 2.65,2.05 2.65,3.25 1.95,3.25 1.95,2.05 2.65,2.05 ; -4.55,2.05 -5.25,2.05 -5.25,3.25 -4.55,3.25 -4.55,2.05
  silkscreen extent -5.3,-0.7 2.7,5.1
XTAL7_3225 [mil]
  rect 47.2x25.6 smd: 1(-47.25,-32.5) 2(47.25,-32.5) 3(47.25,32.5) 4(-47.25,32.5)
  silkscreen extent -79,-75 79,53
XTAL-RAD-0.2 [mm] "Radial Cap, Thru-Hole; 2 Leads; 0.2 in Pin Spacing"
  round 1.2 hole 0.7: 1(-2.54,0) 2(2.54,0)
  silkscreen extent -5.46,-1.91 5.46,1.91, body extent -5.33,-2.05 5.33,2.05, height 3.22

## Part data
BT1 P7: "Header, 4-Pin"
C1 C2 C3 C7 C13 C15 C16 C17 C18 C22 C24 C27 C28 C29 C32 C33 C34 C35 C36 C37 C38: "贴片电容"
C4: "Capacitor"
C8 C12: "Polarized Capacitor (Radial)"
F1 F2: library part "Fuse 1", "Fuse"
LS2: "Electrical Bell"
OLED1: "Header, 7-Pin"
P1: "Header, 10-Pin, Dual row"
P2 P3: "Header, 8-Pin, Dual row"
P4 U5: "Header, 6-Pin, Dual row"
P5: library part "Header 5X2", "Header, 5-Pin, Dual row"
P6: "Header, 2-Pin"
PMOD2: "Header, 6-Pin"
Q1: "NPN Bipolar Transistor"
R1 R2 R3 R7 R8 R9 R10 R11 R12 R13 R14 R15 R16 R17 R18 R19 R20 R21 R22 R23 R24 R25 R26 R27 R28 R29 R30 R31 R32 R34: "贴片电阻"
R4: library part Res, "Resistor of led"
R5 R6: "Resistor"
S1 S2 S3: "Switch"
SW2: "DIP Switch, 4 Position, SPST"
U2: "LDO"
XTAL1: library part 有源晶体
Y1 Y2: library part XTAL, "晶体振荡器"

## Free pads (board coordinates)
  round 3.4 hole 3: 0(77.85,10.8) 1(4,10.8) 2(4,42) 3(77.85,42)

## Via types
v1: diameter 0.403, hole 0.2, Top Layer to Bottom Layer, tented both sides, 261 vias
v2: diameter 0.503, hole 0.3, Top Layer to Bottom Layer, tented both sides, 25 vias
v3: diameter 0.6, hole 0.4, Top Layer to Bottom Layer, tented both sides, 11 vias
v4: diameter 0.508, hole 0.33, Top Layer to Bottom Layer, tented both sides, 5 vias
v5: diameter 0.703, hole 0.4, Top Layer to Bottom Layer, tented both sides, 3 vias
v6: diameter 0.603, hole 0.4, Top Layer to Bottom Layer, tented both sides, 2 vias
v7: diameter 0.503, hole 0.25, Top Layer to Bottom Layer, tented both sides, 2 vias
v8: diameter 0.6, hole 0.24, Top Layer to Bottom Layer, tented both sides, 1 vias
v9: diameter 0.508, hole 0.349, Top Layer to Bottom Layer, tented both sides, 1 vias
v10: diameter 0.603, hole 0.3, Top Layer to Bottom Layer, tented both sides, 1 vias

## Nets (pads, with @x,y where several pads share a name; then routed paths per layer and width w, separated by ;. In a path a pad name is that pad's centre, name@x,y a point inside that pad or via, vN(x,y) a via of type N, cw(c..) or ccw(c..) an arc to the next point about the centre after c; other vN are vias at no path point)
3.3V: C1.2 C2.2 C3.2 C4.2 C12.1 C15.2 C16.2 C17.2 C18.2 C27.2 C28.2 C29.2 F2.2 FB1.1 FB2.1 LS2.1 OLED1.6 P3.3 P3.7 P5.1 PMOD2.6 R4.1 R7.2 R9.1 R12.2 R13.2 R14.2 R15.2 R16.2 R18.2 R19.2 R32.1 SD*2.4 U1.E5 U1.E6 U1.E7 U1.E8 U1.F5 U1.F8 U1.L6 U3.C3 U3.C4 U3.G3 U3.G4 U4.A6 U4.D6 U4.E1 U5.11 U5.12 U6.10 U6.14 U6.26 U6.31 | length 68.9
  Top Layer w0.254: C3.2@8.25,30.875 8.525,30.875 v1(9,31.35) ; U4.E1@8.725,26.55 v1(8.725,27.1) ; U4.D6@9.475,22.8 9.475,21.425 9.6,21.3 v2(11.825,21.3) 11.825,22.7 U4.A6@11.725,22.8 ; SD*2.4@10.447,5.187 v1@10.447,6.722 ; 37.21,24.8 v1(37.7,24.8) ; 37.226,23.8 v1(37.7,23.8) ; 37.692,24.3 U1.E7@37.2,24.3 ; 37.7,22.306 v1(37.7,22.8) ; U1.F5@38.2,22.3 U1.E5@37.2,22.3 ; v1(42.7,23.8) U1.L6@43.2,23.3 ; C28.2@58.75,23.925 v2(58.75,24.8) ; C28.2@59,23.675 U6.26@60.625,23.675 ; v2(59.125,21.125) 59.175,21.175 U6.31@60.625,21.175 ; U6.14@66.975,25.525 v2(66.975,27.025) ; U6.10@68.825,23.175 71.206,23.175 71.487,23.456 v2(71.487,25.161) ; U1.E5@37.2,22.3 U1.E6@37.2,23.3 ; U1.E5@37.2,22.3 v1(37.7,22.8) ; U1.E6@37.2,23.3 v1(37.7,23.8) ; U1.E6@37.2,23.3 U1.E7@37.2,24.3 ; U1.E6@37.2,23.3 v1(37.7,22.8) ; U1.E7@37.2,24.3 U1.E8@37.2,25.3 ; U1.E7@37.2,24.3 v1(37.7,23.8) ; U1.E7@37.2,24.3 v1(37.7,24.8) ; U1.E8@37.2,25.3 v1(37.7,24.8) ; U1.E8@37.2,25.3 37.643,25.3 ; 37.643,25.3 37.7,25.243 v1(37.7,24.8) ; 37.643,25.3 U1.F8@38.2,25.3 v1(37.7,24.8) ; v1(37.7,22.8) v1(37.7,23.8) ; v1(37.7,23.8) v1(37.7,24.8)
  Top Layer w0.381: U3.G3@18.675,23.15 U3.G3@18.825,23.15 ; 19.075,23.176 v1(19.075,23.4) ; 19.075,26.376 v1@19.075,26.75 ; v1(19.075,26.8) v1@19.075,26.75 ; U3.G4@19.475,23.15 U3.G4@19.325,23.15 ; F2.2@61.775,37.45 v1(61.775,40.125) ; U3.G3@18.825,23.15 U3.G4@19.325,23.15 ; U3.G3@18.825,23.15 v1(19.075,23.4) ; v1(19.075,23.4) U3.G4@19.325,23.15 ; v1@19.075,26.75 U3.C4@19.475,26.35 U3.C3@18.675,26.35 v1@19.075,26.75
  Top Layer w0.508: C27.2@45.65,37.725 FB2.1@46.925,37.725 v2(46.925,38.625)
  Bottom Layer w0.254: v2(3.7,21.125) R15.2@4.575,21.125 ; C17.2@10.05,8.075 10.05,7.125 v1(10.45,6.725) ; v2(11.825,21.3) 11.825,20.925 11.9,20.85 C16.2@12.55,20.85 R14.2@12.55,19.425 ; R16.2@12.15,30.025 v2(12.15,33.9) ; v1(37.7,22.8) 37.7,22.142 37.871,21.971 FB1.1@38.67,21.971 ; R7.2@40.45,9.75 v2(40.45,10.775) ; R9.1@45.75,24.425 46.85,24.425 v2(47.05,24.625) ; R19.2@56.709,19.651 58.096,19.651 R18.2@58.1,19.647 58.872,19.647 59.125,19.9 v2(59.125,21.125) ; R32.1@61.769,48.864 v1(62.566,48.864) ; R13.2@66.381,29.718 R12.2@66.381,28.219 66.381,27.619 v2(66.975,27.025)
  Bottom Layer w0.381: C4.2@13.2,46.175 13.744,46.175 13.832,46.087 LS2.1@13.832,43.15 14.575,42.407 R4.1@14.575,40.975
  other v1: 61.775,36.83 61.775,37.379 61.775,37.928 61.775,38.477 61.775,39.027 61.775,39.576
5V: BT1.4 C8.1 C22.2 C34.2 F1.2 L3.1 R1.1 R22.1 R23.1 R24.1 U2.1 U2.3 U6.3 U6.4 U6.42 U7.6 U7.8 | length 113.4
  Top Layer w0.254: U6.42@64.475,17.325 v1(64.475,18.45) ; U6.3@68.825,19.675 64.9,19.675 v2(64.525,20.05) 64.65,20.175 U6.4@68.825,20.175 ; v6(71.35,37.75) F1.2@71.35,39.7 ; R1.1@72.55,15.1 v2(76.35,15.1) ; v2(76.725,20.775) 76.725,19.775 76.975,19.525 78.75,19.525 78.954,19.729 U7.6@78.954,20.791 ; 77.654,19.525 U7.8@77.654,20.791
  Top Layer w0.381: U2.1@67.629,40.825 71.075,40.825 ; U2.3@67.629,42.725 C8.1@71.35,42.725 71.35,40.825 ; L3.1@67.875,38.825 U2.1@67.875,40.579 ; F1.2@71.075,39.975 71.075,40.825 ; F1.2@71.35,39.7 71.35,40.825 ; 71.075,40.825 71.35,40.825
  Bottom Layer w0.254: BT1.4@49.65,10.555 55.205,10.555 55.575,10.925 55.575,16.275 55.9,16.6 64.2,16.6 64.475,16.875 v1(64.475,18.45) C22.2@64.475,19.35 ; C22.2@64.45,19.375 64.45,19.975 v2(64.525,20.05) 64.492,20.083 64.492,36.217 65.125,36.85 75.575,36.85 76.671,35.754 76.671,20.829 v2(76.725,20.775) ; 71.35,36.875 v6(71.35,37.75) ; v2(76.35,15.1) R24.1@77.1,15.1 ; v2@76.741,20.791 C34.2@77.604,20.791 R24.1@77.604,14.954 ; R24.1@77.25,14.95 R23.1@78.65,14.95 R22.1@80,14.95
50MHZ: U1.M12 XTAL1.3 | length 3.6
  Top Layer w0.381: U1.M12@44.2,29.3 45.3,29.3 45.725,29.726 XTAL1.3@45.725,31.625
AD0: U1.A2 U3.J6 U4.B6 | length 60.6
  Top Layer w0.102: U4.B6@10.975,22.8 11.35,22.425 v1(11.35,22.3) ; v1(12.825,16.4) 13.167,16.4 13.167,16.631 cw(c13.19,16.631) 13.19,16.654 13.373,16.654 cw(c13.373,16.631) 13.396,16.631 13.396,16.169 ccw(c13.419,16.169) 13.419,16.146 13.601,16.146 ccw(c13.601,16.169) 13.624,16.169 13.624,16.631 cw(c13.647,16.631) 13.647,16.654 13.83,16.654 cw(c13.83,16.631) 13.853,16.631 13.853,16.169 ccw(c13.876,16.169) 13.876,16.146 14.059,16.146 ccw(c14.059,16.169) 14.082,16.169 14.082,16.631 cw(c14.104,16.631) 14.104,16.654 14.287,16.654 cw(c14.287,16.631) 14.31,16.631 14.31,16.169 ccw(c14.333,16.169) 14.333,16.146 14.516,16.146 ccw(c14.516,16.169) 14.539,16.169 14.539,16.631 cw(c14.562,16.631) 14.562,16.654 14.744,16.654 cw(c14.744,16.631) 14.767,16.631 14.767,16.169 ccw(c14.79,16.169) 14.79,16.146 14.973,16.146 ccw(c14.973,16.169) 14.996,16.169 14.996,16.631 cw(c15.019,16.631) 15.019,16.654 15.202,16.654 cw(c15.202,16.631) 15.225,16.631 15.225,16.169 ccw(c15.247,16.169) 15.247,16.146 15.43,16.146 ccw(c15.43,16.169) 15.453,16.169 15.453,16.631 cw(c15.476,16.631) 15.476,16.654 15.659,16.654 cw(c15.659,16.631) 15.682,16.631 15.682,16.169 ccw(c15.705,16.169) 15.705,16.146 15.887,16.146 ccw(c15.887,16.169) 15.91,16.169 15.91,16.631 cw(c15.933,16.631) 15.933,16.654 16.116,16.654 cw(c16.116,16.631) 16.139,16.631 16.139,16.169 ccw(c16.162,16.169) 16.162,16.146 16.345,16.146 ccw(c16.345,16.169) 16.368,16.169 16.368,16.631 cw(c16.39,16.631) 16.39,16.654 16.573,16.654 cw(c16.573,16.631) 16.596,16.631 16.596,16.169 ccw(c16.619,16.169) 16.619,16.146 16.802,16.146 ccw(c16.802,16.169) 16.825,16.169 16.825,16.631 cw(c16.848,16.631) 16.848,16.654 17.03,16.654 cw(c17.03,16.631) 17.053,16.631 17.053,16.169 ccw(c17.076,16.169) 17.076,16.146 17.259,16.146 ccw(c17.259,16.169) 17.282,16.169 17.282,16.631 cw(c17.305,16.631) 17.305,16.654 17.488,16.654 cw(c17.488,16.631) 17.511,16.631 17.511,16.169 ccw(c17.533,16.169) 17.533,16.146 17.716,16.146 ccw(c17.716,16.169) 17.739,16.169 17.739,16.631 cw(c17.762,16.631) 17.762,16.654 17.945,16.654 cw(c17.945,16.631) 17.968,16.631 17.968,16.169 ccw(c17.991,16.169) 17.991,16.146 18.173,16.146 ccw(c18.173,16.169) 18.196,16.169 18.196,16.631 cw(c18.219,16.631) 18.219,16.654 18.402,16.654 cw(c18.402,16.631) 18.425,16.631 18.425,16.169 ccw(c18.448,16.169) 18.448,16.146 18.631,16.146 ccw(c18.631,16.169) 18.654,16.169 18.654,16.4 v1(21.075,16.4) ; v1(21.075,21.025) U3.J6@21.075,21.55 ; v1@32.465,18.8 32.965,19.3 U1.A2@33.2,19.3
  Bottom Layer w0.102: v1(11.35,22.3) 11.35,18.9 12.2,18.05 12.2,16.675 12.475,16.4 v1(12.825,16.4) ; v1(21.075,21.025) v1(21.075,16.4) 22.037,16.4 cw(c22.037,16.377) 22.06,16.377 22.06,16.042 ccw(c22.083,16.042) 22.083,16.019 22.266,16.019 ccw(c22.266,16.042) 22.288,16.042 22.288,16.724 cw(c22.311,16.724) 22.311,16.747 22.494,16.747 cw(c22.494,16.724) 22.517,16.724 22.517,16.042 ccw(c22.54,16.042) 22.54,16.019 22.723,16.019 ccw(c22.723,16.042) 22.746,16.042 22.746,16.724 cw(c22.769,16.724) 22.769,16.747 22.951,16.747 cw(c22.951,16.724) 22.974,16.724 22.974,16.042 ccw(c22.997,16.042) 22.997,16.019 23.18,16.019 ccw(c23.18,16.042) 23.203,16.042 23.203,16.724 cw(c23.226,16.724) 23.226,16.747 23.409,16.747 cw(c23.409,16.724) 23.431,16.724 23.431,16.042 ccw(c23.454,16.042) 23.454,16.019 23.637,16.019 ccw(c23.637,16.042) 23.66,16.042 23.66,16.724 cw(c23.683,16.724) 23.683,16.747 23.866,16.747 cw(c23.866,16.724) 23.889,16.724 23.889,16.042 ccw(c23.912,16.042) 23.912,16.019 24.094,16.019 ccw(c24.094,16.042) 24.117,16.042 24.117,16.724 cw(c24.14,16.724) 24.14,16.747 24.323,16.747 cw(c24.323,16.724) 24.346,16.724 24.346,16.042 ccw(c24.369,16.042) 24.369,16.019 24.552,16.019 ccw(c24.552,16.042) 24.575,16.042 24.575,16.724 cw(c24.597,16.724) 24.597,16.747 24.78,16.747 cw(c24.78,16.724) 24.803,16.724 24.803,16.042 ccw(c24.826,16.042) 24.826,16.019 25.009,16.019 ccw(c25.009,16.042) 25.032,16.042 25.032,16.724 cw(c25.055,16.724) 25.055,16.747 25.237,16.747 cw(c25.237,16.724) 25.26,16.724 25.26,16.042 ccw(c25.283,16.042) 25.283,16.019 25.466,16.019 ccw(c25.466,16.042) 25.489,16.042 25.489,16.724 cw(c25.512,16.724) 25.512,16.747 25.695,16.747 cw(c25.695,16.724) 25.717,16.724 25.717,16.042 ccw(c25.74,16.042) 25.74,16.019 25.923,16.019 ccw(c25.923,16.042) 25.946,16.042 25.946,16.724 cw(c25.969,16.724) 25.969,16.747 26.152,16.747 cw(c26.152,16.724) 26.175,16.724 26.175,16.042 ccw(c26.198,16.042) 26.198,16.019 26.38,16.019 ccw(c26.38,16.042) 26.403,16.042 26.403,16.37 26.433,16.4 32.3,16.4 32.461,16.561 v1(32.461,18.796)
AD1: U1.A3 U3.H6 U4.C5 | length 61.1
  Top Layer w0.102: U4.C5@10.225,23.55 v1(10.6,23.175) ; v1(11.825,16.95) 14.962,16.95 ccw(c14.962,16.973) 14.985,16.973 14.985,17.181 cw(c15.008,17.181) 15.008,17.204 15.191,17.204 cw(c15.191,17.181) 15.214,17.181 15.214,16.973 ccw(c15.236,16.973) 15.236,16.95 15.419,16.95 ccw(c15.419,16.973) 15.442,16.973 15.442,17.181 cw(c15.465,17.181) 15.465,17.204 15.648,17.204 cw(c15.648,17.181) 15.671,17.181 15.671,16.973 ccw(c15.694,16.973) 15.694,16.95 15.876,16.95 ccw(c15.876,16.973) 15.899,16.973 15.899,17.181 cw(c15.922,17.181) 15.922,17.204 16.105,17.204 cw(c16.105,17.181) 16.128,17.181 16.128,16.973 ccw(c16.151,16.973) 16.151,16.95 16.334,16.95 ccw(c16.334,16.973) 16.357,16.973 16.357,17.181 cw(c16.379,17.181) 16.379,17.204 16.562,17.204 cw(c16.562,17.181) 16.585,17.181 16.585,16.973 ccw(c16.608,16.973) 16.608,16.95 16.791,16.95 ccw(c16.791,16.973) 16.814,16.973 16.814,17.181 cw(c16.837,17.181) 16.837,17.204 17.019,17.204 cw(c17.019,17.181) 17.042,17.181 17.042,16.973 ccw(c17.065,16.973) 17.065,16.95 17.248,16.95 ccw(c17.248,16.973) 17.271,16.973 17.271,17.181 cw(c17.294,17.181) 17.294,17.204 17.477,17.204 cw(c17.477,17.181) 17.5,17.181 17.5,16.973 ccw(c17.522,16.973) 17.522,16.95 17.705,16.95 ccw(c17.705,16.973) 17.728,16.973 17.728,17.181 cw(c17.751,17.181) 17.751,17.204 17.934,17.204 cw(c17.934,17.181) 17.957,17.181 17.957,16.973 ccw(c17.98,16.973) 17.98,16.95 18.162,16.95 ccw(c18.162,16.973) 18.185,16.973 18.185,17.181 cw(c18.208,17.181) 18.208,17.204 18.391,17.204 cw(c18.391,17.181) 18.414,17.181 18.414,16.973 ccw(c18.437,16.973) 18.437,16.95 18.62,16.95 ccw(c18.62,16.973) 18.643,16.973 18.643,17.181 cw(c18.665,17.181) 18.665,17.204 18.848,17.204 cw(c18.848,17.181) 18.871,17.181 18.871,16.719 ccw(c18.894,16.719) 18.894,16.696 19.077,16.696 ccw(c19.077,16.719) 19.1,16.719 19.1,17.181 cw(c19.123,17.181) 19.123,17.204 19.305,17.204 cw(c19.305,17.181) 19.328,17.181 19.328,16.719 ccw(c19.351,16.719) 19.351,16.696 19.534,16.696 ccw(c19.534,16.719) 19.557,16.719 19.557,17.181 cw(c19.58,17.181) 19.58,17.204 19.763,17.204 cw(c19.763,17.181) 19.786,17.181 19.786,16.719 ccw(c19.808,16.719) 19.808,16.696 19.991,16.696 ccw(c19.991,16.719) 20.014,16.719 20.014,17.181 cw(c20.037,17.181) 20.037,17.204 20.22,17.204 cw(c20.22,17.181) 20.243,17.181 20.243,16.719 ccw(c20.266,16.719) 20.266,16.696 20.448,16.696 ccw(c20.448,16.719) 20.471,16.719 20.471,17.181 cw(c20.494,17.181) 20.494,17.204 20.677,17.204 cw(c20.677,17.181) 20.7,17.181 20.7,16.737 ccw(c20.723,16.737) 20.723,16.714 20.906,16.714 ccw(c20.906,16.737) 20.929,16.737 20.929,17.181 cw(c20.951,17.181) 20.951,17.204 21.134,17.204 cw(c21.134,17.181) 21.157,17.181 21.157,16.762 ccw(c21.18,16.762) 21.18,16.739 21.363,16.739 ccw(c21.363,16.762) 21.386,16.762 21.386,16.927 cw(c21.409,16.927) 21.409,16.95 v1(21.75,16.95) ; U3.H6@21.075,22.35 v1(21.725,22.35) ; v1(32.207,20.168) 32.512,20.168 32.644,20.3 U1.A3@33.2,20.3
  Bottom Layer w0.102: v1(10.6,23.175) 10.925,22.85 10.925,18.75 11.25,18.425 11.25,17.525 v1(11.825,16.95) ; v1(21.725,22.35) 21.75,22.35 v1(21.75,16.95) 29.477,16.95 29.477,16.603 29.705,16.603 29.705,17.297 29.934,17.297 29.934,16.603 30.162,16.603 30.162,17.297 30.391,17.297 30.391,16.603 30.62,16.603 30.62,17.297 30.848,17.297 30.848,16.603 31.077,16.603 31.077,16.95 31.631,16.95 31.674,16.993 31.674,17.259 31.298,17.259 31.298,17.488 32.055,17.488 32.055,17.716 31.318,17.716 31.318,17.945 32.055,17.945 32.055,18.174 31.318,18.174 31.318,18.402 32.055,18.402 32.055,18.631 31.318,18.631 31.318,18.86 32.055,18.86 32.055,19.088 31.318,19.088 31.318,19.317 32.055,19.317 32.055,19.545 31.318,19.545 31.318,19.774 32.016,19.774 32.016,20.002 31.674,20.002 31.674,20.117 31.725,20.168 v1(32.207,20.168)
AD2: U1.A4 U3.H5 U4.C6 | length 61.7
  Top Layer w0.102: U4.C6@10.225,22.8 10.225,22.3 v1(10.475,22.05) ; v1(10.85,17.5) 11.255,17.5 ccw(c11.255,17.523) 11.278,17.523 11.278,17.731 cw(c11.301,17.731) 11.301,17.754 11.484,17.754 cw(c11.484,17.731) 11.507,17.731 11.507,17.31 ccw(c11.53,17.31) 11.53,17.287 11.712,17.287 ccw(c11.712,17.31) 11.735,17.31 11.735,17.731 cw(c11.758,17.731) 11.758,17.754 11.941,17.754 cw(c11.941,17.731) 11.964,17.731 11.964,17.29 ccw(c11.987,17.29) 11.987,17.267 12.17,17.267 ccw(c12.17,17.29) 12.193,17.29 12.193,17.731 cw(c12.215,17.731) 12.215,17.754 12.398,17.754 cw(c12.398,17.731) 12.421,17.731 12.421,17.269 ccw(c12.444,17.269) 12.444,17.246 12.627,17.246 ccw(c12.627,17.269) 12.65,17.269 12.65,17.731 cw(c12.673,17.731) 12.673,17.754 12.855,17.754 cw(c12.855,17.731) 12.878,17.731 12.878,17.269 ccw(c12.901,17.269) 12.901,17.246 13.084,17.246 ccw(c13.084,17.269) 13.107,17.269 13.107,17.731 cw(c13.13,17.731) 13.13,17.754 13.313,17.754 cw(c13.313,17.731) 13.336,17.731 13.336,17.269 ccw(c13.358,17.269) 13.358,17.246 13.541,17.246 ccw(c13.541,17.269) 13.564,17.269 13.564,17.731 cw(c13.587,17.731) 13.587,17.754 13.77,17.754 cw(c13.77,17.731) 13.793,17.731 13.793,17.269 ccw(c13.816,17.269) 13.816,17.246 13.998,17.246 ccw(c13.998,17.269) 14.021,17.269 14.021,17.731 cw(c14.044,17.731) 14.044,17.754 14.227,17.754 cw(c14.227,17.731) 14.25,17.731 14.25,17.269 ccw(c14.273,17.269) 14.273,17.246 14.456,17.246 ccw(c14.456,17.269) 14.479,17.269 14.479,17.731 cw(c14.501,17.731) 14.501,17.754 14.684,17.754 cw(c14.684,17.731) 14.707,17.731 14.707,17.523 ccw(c14.73,17.523) 14.73,17.5 v1(22.45,17.5) ; U3.H5@20.275,22.35 v1(20.675,22.75) ; v1(32.2,20.8) 32.7,20.8 U1.A4@33.2,21.3
  Bottom Layer w0.102: v1(10.475,22.05) 10.475,17.875 v1(10.85,17.5) ; v1(20.675,22.75) 22.325,22.75 22.45,22.625 v1(22.45,17.5) 24.092,17.5 24.092,17.835 cw(c24.103,17.835) 24.103,17.847 24.309,17.847 cw(c24.309,17.835) 24.32,17.835 24.32,17.165 ccw(c24.332,17.165) 24.332,17.153 24.538,17.153 ccw(c24.538,17.165) 24.549,17.165 24.549,17.835 cw(c24.561,17.835) 24.561,17.847 24.766,17.847 cw(c24.766,17.835) 24.778,17.835 24.778,17.165 ccw(c24.789,17.165) 24.789,17.153 24.995,17.153 ccw(c24.995,17.165) 25.006,17.165 25.006,17.835 cw(c25.018,17.835) 25.018,17.847 25.223,17.847 cw(c25.223,17.835) 25.235,17.835 25.235,17.165 ccw(c25.246,17.165) 25.246,17.153 25.452,17.153 ccw(c25.452,17.165) 25.463,17.165 25.463,17.835 cw(c25.475,17.835) 25.475,17.847 25.681,17.847 cw(c25.681,17.835) 25.692,17.835 25.692,17.165 ccw(c25.704,17.165) 25.704,17.153 25.909,17.153 ccw(c25.909,17.165) 25.921,17.165 25.921,17.835 cw(c25.932,17.835) 25.932,17.847 26.138,17.847 cw(c26.138,17.835) 26.149,17.835 26.149,17.165 ccw(c26.161,17.165) 26.161,17.153 26.366,17.153 ccw(c26.366,17.165) 26.378,17.165 26.378,17.835 cw(c26.389,17.835) 26.389,17.847 26.595,17.847 cw(c26.595,17.835) 26.607,17.835 26.607,17.165 ccw(c26.618,17.165) 26.618,17.153 26.824,17.153 ccw(c26.824,17.165) 26.835,17.165 26.835,17.835 cw(c26.847,17.835) 26.847,17.847 27.052,17.847 cw(c27.052,17.835) 27.064,17.835 27.064,17.165 ccw(c27.075,17.165) 27.075,17.153 27.281,17.153 ccw(c27.281,17.165) 27.292,17.165 27.292,17.835 cw(c27.304,17.835) 27.304,17.847 27.509,17.847 cw(c27.509,17.835) 27.521,17.835 27.521,17.165 ccw(c27.532,17.165) 27.532,17.153 27.738,17.153 ccw(c27.738,17.165) 27.749,17.165 27.749,17.835 cw(c27.761,17.835) 27.761,17.847 27.967,17.847 cw(c27.967,17.835) 27.978,17.835 27.978,17.165 ccw(c27.99,17.165) 27.99,17.153 28.195,17.153 ccw(c28.195,17.165) 28.207,17.165 28.207,17.835 cw(c28.218,17.835) 28.218,17.847 28.424,17.847 cw(c28.424,17.835) 28.435,17.835 28.435,17.165 ccw(c28.447,17.165) 28.447,17.153 28.652,17.153 ccw(c28.652,17.165) 28.664,17.165 28.664,17.835 cw(c28.675,17.835) 28.675,17.847 28.881,17.847 cw(c28.881,17.835) 28.892,17.835 28.892,17.165 ccw(c28.904,17.165) 28.904,17.153 29.11,17.153 ccw(c29.11,17.165) 29.121,17.165 29.121,17.835 cw(c29.133,17.835) 29.133,17.847 29.338,17.847 cw(c29.338,17.835) 29.35,17.835 29.35,17.5 31.039,17.5 31.115,17.576 31.115,20.574 31.341,20.8 v1(32.2,20.8)